# EAGLE board untitled (EAGLE 7.3.0)
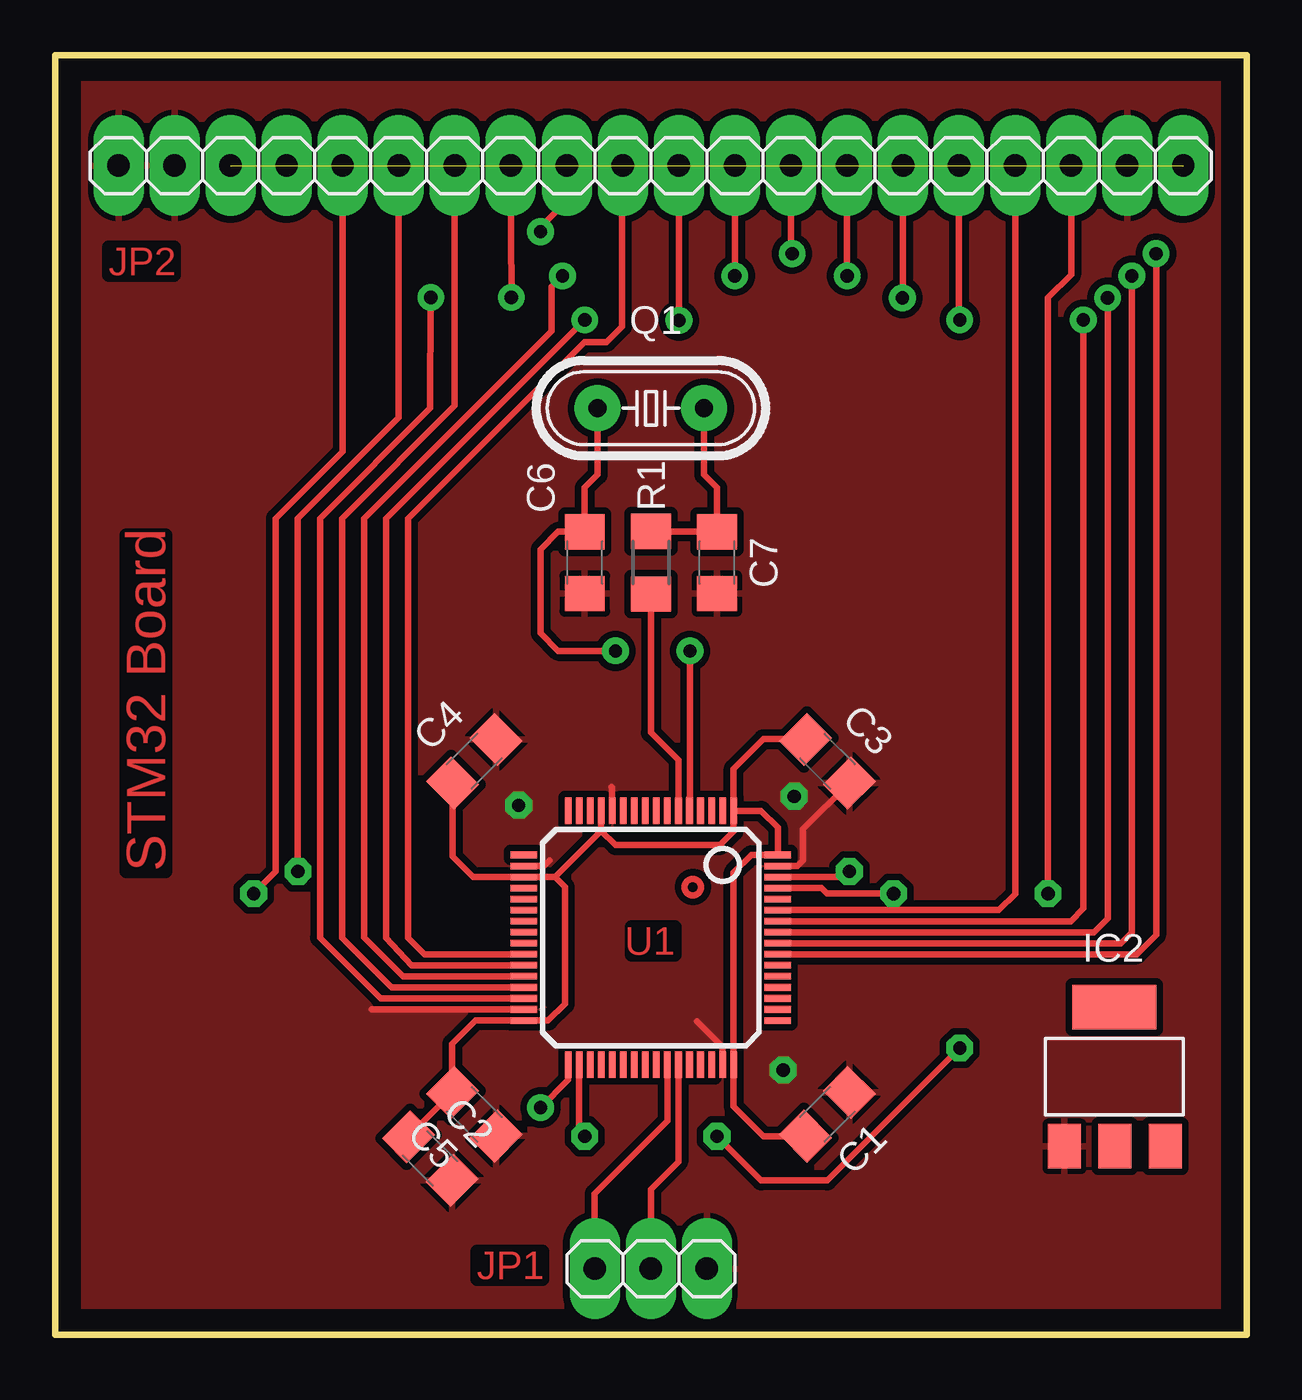
[diagram p0: board, top side]
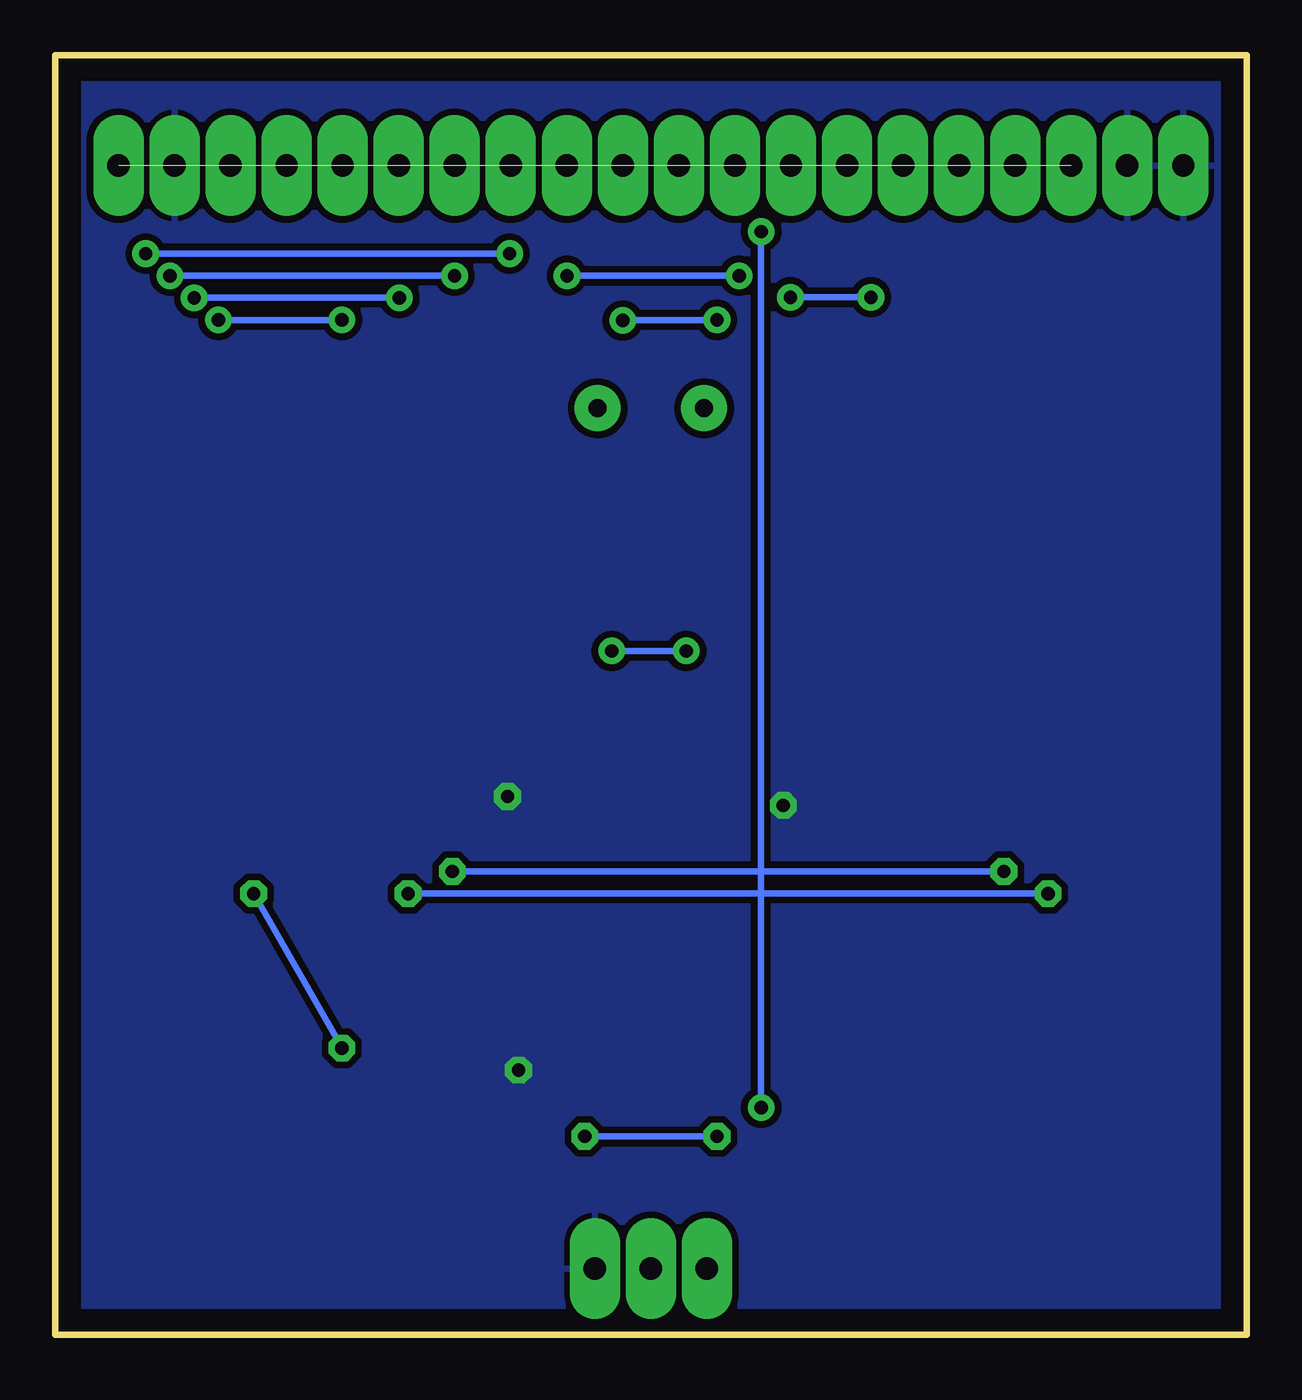
[diagram p1: board, bottom side, seen from below]

Size 54 x 58 mm. Coordinates in mm from the lower left corner, seen from the top.
Outline: 0,0 54,0 54,58 0,58 0,0
Copper layers (1*16): Top 0.035mm / dielectric 1.5mm / Bottom 0.035mm
Design rules "default": minimum track width 12mil, minimum drill 32mil, track to track 12mil, track to pad 12mil, pad to pad 12mil, via to via 12mil, smd to smd 8mil, copper to edge 40mil, drill to drill 40mil, minimum pad ring 25mil, minimum via ring 12mil, stop-mask expansion 4mil, vias tented up to drill 0mil, thermal gap 10mil

## Footprints (pad centres in the part's own frame; a part is rotated, then mirrored left to right if it is on the bottom)
C1206 = smd 1.6 x 1.8: 1 -1.4,0; 2 1.4,0
SOT223 = smd 1.499 x 2.007: 1 -2.261,-3.15; 2 0.025,-3.15; 3 2.311,-3.15 | smd 3.81 x 2.007: 4 0,3.15
1X03 = drill 1.016 long: 1 -2.54,0; 2 0,0; 3 2.54,0
1X20 = drill 1.016 long: 1 -24.13,0; 2 -21.59,0; 3 -19.05,0; 4 -16.51,0; 5 -13.97,0; 6 -11.43,0; 7 -8.89,0; 8 -6.35,0; 9 -3.81,0; 10 -1.27,0; 11 1.27,0; 12 3.81,0; 13 6.35,0; 14 8.89,0; 15 11.43,0; 16 13.97,0; 17 16.51,0; 18 19.05,0; 19 21.59,0; 20 24.13,0
HC49/S = drill 0.813: 1 -2.413,0; 2 2.413,0
R1206 = smd 1.6 x 1.803: 1 -1.422,0; 2 1.422,0
LQFP64 = smd 0.3 x 1.2: 1 -3.75,-5.75; 2 -3.25,-5.75; 3 -2.75,-5.75; 4 -2.25,-5.75; 5 -1.75,-5.75; 6 -1.25,-5.75; 7 -0.75,-5.75; 8 -0.25,-5.75; 9 0.25,-5.75; 10 0.75,-5.75; 11 1.25,-5.75; 12 1.75,-5.75; 13 2.25,-5.75; 14 2.75,-5.75; 15 3.25,-5.75; 16 3.75,-5.75; 33 3.75,5.75; 34 3.25,5.75; 35 2.75,5.75; 36 2.25,5.75; 37 1.75,5.75; 38 1.25,5.75; 39 0.75,5.75; 40 0.25,5.75; 41 -0.25,5.75; 42 -0.75,5.75; 43 -1.25,5.75; 44 -1.75,5.75; 45 -2.25,5.75; 46 -2.75,5.75; 47 -3.25,5.75; 48 -3.75,5.75 | smd 1.2 x 0.3: 17 5.75,-3.75; 18 5.75,-3.25; 19 5.75,-2.75; 20 5.75,-2.25; 21 5.75,-1.75; 22 5.75,-1.25; 23 5.75,-0.75; 24 5.75,-0.25; 25 5.75,0.25; 26 5.75,0.75; 27 5.75,1.25; 28 5.75,1.75; 29 5.75,2.25; 30 5.75,2.75; 31 5.75,3.25; 32 5.75,3.75; 49 -5.75,3.75; 50 -5.75,3.25; 51 -5.75,2.75; 52 -5.75,2.25; 53 -5.75,1.75; 54 -5.75,1.25; 55 -5.75,0.75; 56 -5.75,0.25; 57 -5.75,-0.25; 58 -5.75,-0.75; 59 -5.75,-1.25; 60 -5.75,-1.75; 61 -5.75,-2.25; 62 -5.75,-2.75; 63 -5.75,-3.25; 64 -5.75,-3.75

## Placement (x,y rotation side)
C1  100 nF  [C1206]  35,10 225 top
C2  10 μF  [C1206]  17,8 315 top
C3  100 nF  [C1206]  35,26 315 top
C4  100 nF  [C1206]  19,26 45 top
C5  100 nF  [C1206]  19,10 135 top
C6  30 pF  [C1206]  24,35 90 top
C7  30 pF  [C1206]  30,35 90 top
IC2  REG1117  [SOT223]  48.01,11.7 0 top
JP1  [1X03]  27,3 0 top
JP2  [1X20]  27,53 0 top
Q1  16 MHz  [HC49/S]  27,42 0 top
R1  [R1206]  27,35 270 top
U1  STM32103RBT6  [LQFP64]  27,18 180 top

## Library data of the parts
C1-C7 R1 = resistor
IC2 = burr-brown; MPN: REG1117; OC_FARNELL: 1097566; OC_NEWARK: 14P6981
JP1 JP2 = pinhead
Q1 = crystal; OC_FARNELL: 1667008; OC_NEWARK: unknown
U1 = MyLib

## Nets
+3V3: C1.2 C2.1 C3.1 C4.1 C5.2 U1.1 U1.13 U1.19 U1.32 U1.48 U1.64
+5V: JP2.3 JP2.4 JP2.20
GND: C1.1 C2.2 C3.2 C4.2 C5.1 C6.1 C7.1 IC2.1 JP1.3 JP2.1 JP2.2 JP2.19 U1.12 U1.18 U1.31 U1.47 U1.63
LCD_CD: JP2.8 U1.30
LCD_CE: JP2.7 U1.29
LCD_DB0: JP2.10 U1.26
LCD_DB1: JP2.11 U1.27
LCD_DB2: JP2.12 U1.28
LCD_DB3: JP2.13 U1.55
LCD_DB4: JP2.14 U1.56
LCD_DB5: JP2.15 U1.57
LCD_DB6: JP2.16 U1.58
LCD_DB7: JP2.17 U1.59
LCD_FS: JP2.18 U1.34
LCD_RD: JP2.6 U1.62
LCD_RST: JP2.9 U1.33
LCD_WR: JP2.5 U1.61
N$1: C6.2 Q1.1 U1.5
N$2: C7.2 Q1.2 R1.1
N$3: R1.2 U1.6
UART1_RX: JP1.2 U1.43
UART1_TX: JP1.1 U1.42

## Tracks (layer width: path | path; a pad name or v marks a point on that pad's centre or on a via)
+3V3
  Top 0.3: C4.1 18.01,21.69 18.95,20.75 U1.19 22.65,20.75 | U1.1 30.75,25.65 32.1,27 C3.1 | U1.1 32,23.75 32.75,23 U1.64 31.55,21.75 30.75,20.95 U1.48 30.75,10.35 32.1,9 C1.2 | U1.13 24.75,22.85 | 24.75,22.85 25.4,22.2 30.12,22.2 30.75,22.82 U1.1 | 22.65,20.75 24.75,22.85 | 22.65,20.75 23.1,20.3 23.1,15 22.35,14.25 U1.32 19.05,14.25 18,13.2 C5.2 C2.1
+5V  (2 unrouted)
GND  (via drill 0.6)
  Top 0.3: U1.47 30.25,13.05 29.1,14.2 | U1.12 25.25,24.8 25.23,24.82 | U1.18 22.15,21.25 22.4,21.5 | U1.63 33.65,21.25 33.9,21.5 33.9,22.92 C3.2 | U1.31 14.35,14.75
  other vias: 21,24 33.5,24.4 33,12
  pour Top: -0.9,59 -0.9,-1 55,-1 55,59
  pour Bottom: -2,60 -2,-2 56,-2 56,60
LCD_CD  (via drill 0.6)
  Top 0.3: JP2.8 v20.68,47.02 | v17.02,47.02 17,42 12,37 12,18 14.75,15.25 U1.30
  Bottom 0.3: v20.68,47.02 v17.02,47.02
LCD_CE
  Top 0.3: JP2.7 18.11,42.11 13,37 13,18 15.25,15.75 U1.29
LCD_DB0
  Top 0.3: U1.26 16.75,17.25 16,18 16,37 24,45 25,45 25.7,45.7 25.7,52.2 25.73,52.23 JP2.10 25.7,52.97
LCD_DB1  (via drill 0.6)
  Top 0.3: U1.27 16.15,16.75 15,18 15,37 v24,46 | v28.27,45.98 JP2.11
  Bottom 0.3: v24,46 28.25,46 v28.27,45.98
LCD_DB2  (via drill 0.6)
  Top 0.3: JP2.12 v30.81,48.01 v30.8,48 | U1.28 15.78,16.25 14,18.02 14,37 22.5,45.5 22.5,47.5 v23,48
  Bottom 0.3: v30.8,48 v23,48
LCD_DB3  (via drill 0.6)
  Top 0.3: JP2.13 33.35,49.05 v33.4,49 | v49.9,49 49.9,18.12 49.02,17.25 U1.55
  Bottom 0.3: v33.4,49 v49.9,49
LCD_DB4  (via drill 0.6)
  Top 0.3: JP2.14 35.89,49.01 v35.9,48 | v48.8,48 48.8,18.25 48.3,17.75 U1.56
  Bottom 0.3: v35.9,48 v48.8,48
LCD_DB5  (via drill 0.6)
  Top 0.3: JP2.15 38.43,48.03 v38.4,47 | v47.7,47 47.7,18.88 47.08,18.25 U1.57
  Bottom 0.3: v38.4,47 v47.7,47
LCD_DB6  (via drill 0.6)
  Top 0.3: JP2.16 40.97,46.03 v41,46 | v46.6,46 46.6,19.32 46.02,18.75 U1.58
  Bottom 0.3: v41,46 v46.6,46
LCD_DB7
  Top 0.3: JP2.17 43.51,19.98 42.77,19.25 U1.59
LCD_FS  (via drill 0.6)
  Top 0.3: JP2.18 46.05,48.05 45,47 v45,20 | v41,13 35,7 32,7 v30,9 | U1.34 23.75,9.25 v24,9
  Bottom 0.3: v45,20 v41,13 | v30,9 v24,9
LCD_RD  (via drill 0.6)
  Top 0.3: JP2.6 15.57,41.57 11,37 v11,21 | U1.62 35.75,20.75 v36,21
  Bottom 0.3: v11,21 v36,21
LCD_RST  (via drill 0.6)
  Top 0.3: U1.33 23.25,11.55 v22,10.3 | v22,50 22,50.2 23.2,51.4 JP2.9
  Bottom 0.3: v22,10.3 v22,50
LCD_WR  (via drill 0.6)
  Top 0.3: JP2.5 13.03,40.03 10,37 10,21 v9,20 | v38,20 34.98,20 34.73,20.25 U1.61
  Bottom 0.3: v9,20 v38,20
N$1  (via drill 0.6)
  Top 0.3: Q1.1 24.59,38.99 24,38.4 C6.2 22.8,36.4 22,35.6 22,31.8 22.8,31 v25.4,31 | v28.77,31 28.77,24.38 28.75,24.35 U1.5
  Bottom 0.3: v25.4,31 v28.77,31
N$2
  Top 0.3: R1.1 27.02,36.4 C7.2 30,38.4 29.41,38.99 Q1.2
N$3
  Top 0.3: R1.2 27,27.3 28.25,26.05 U1.6
N$4
  Top 0.3: 43,51.8 43.1,51.9
UART1_RX
  Top 0.3: U1.43 28.25,7.85 27,6.6 JP1.2
UART1_TX
  Top 0.3: U1.42 27.75,9.7 24.45,6.4 JP1.1
(copper drawn outside any net)
  shapes: Top circle x1

## Text on the board
Top: STM32 Board